# EAGLE board yuanlitu (EAGLE 9.6.2)
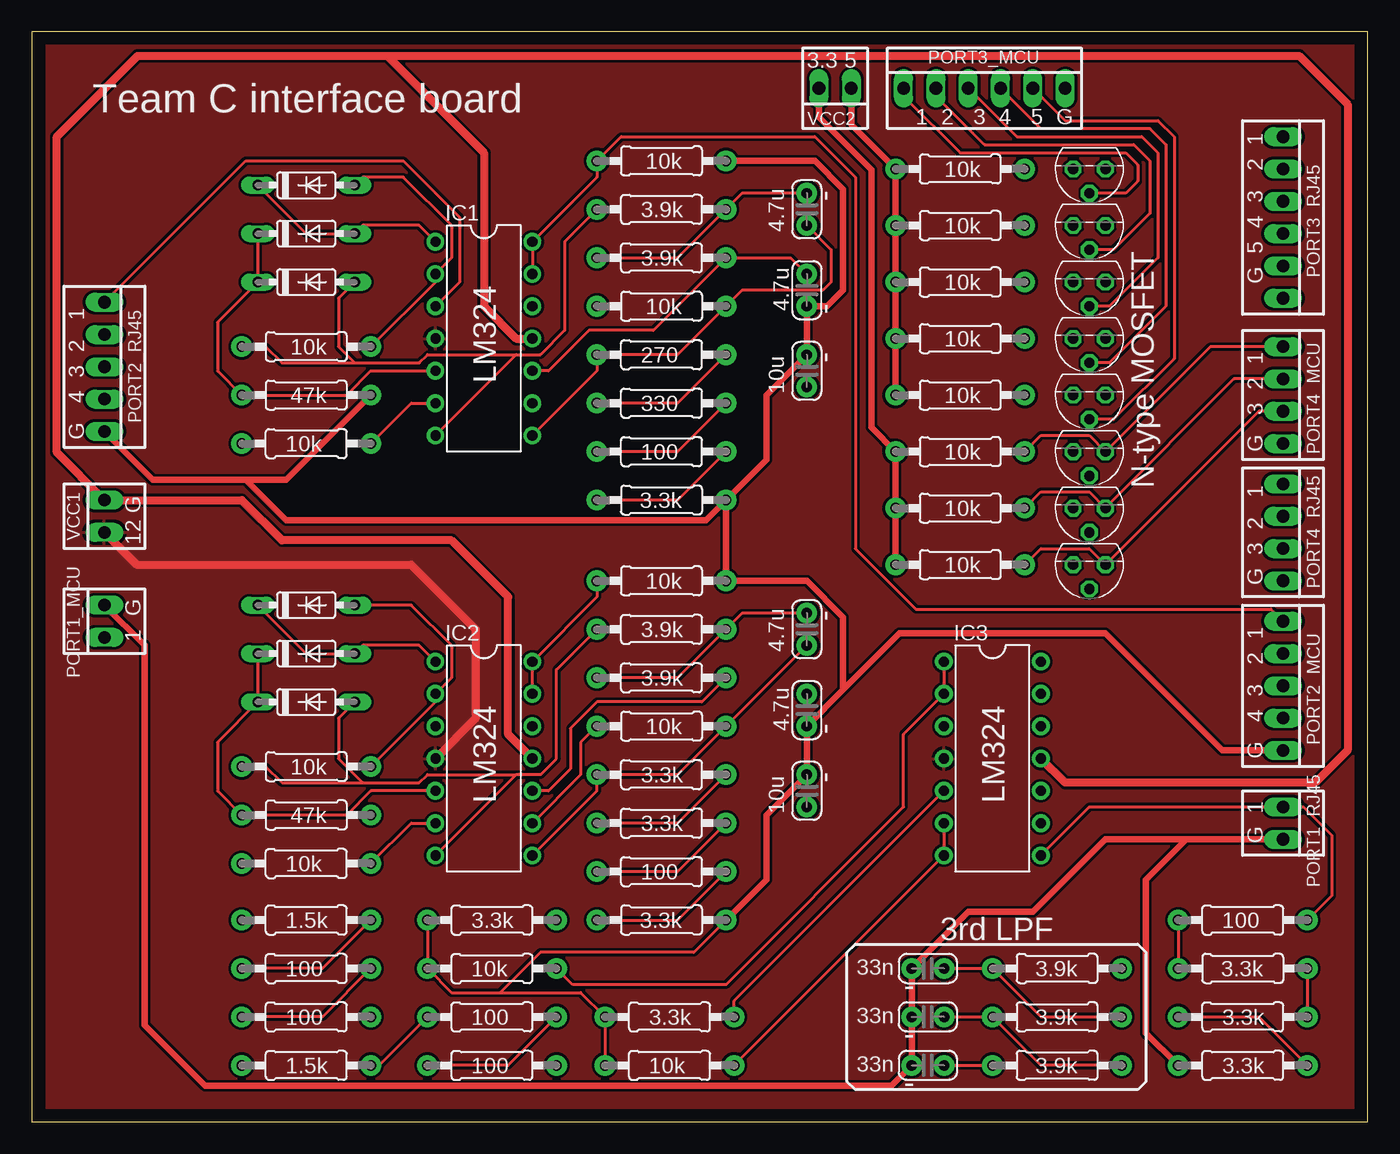
[diagram p0: board, top side]
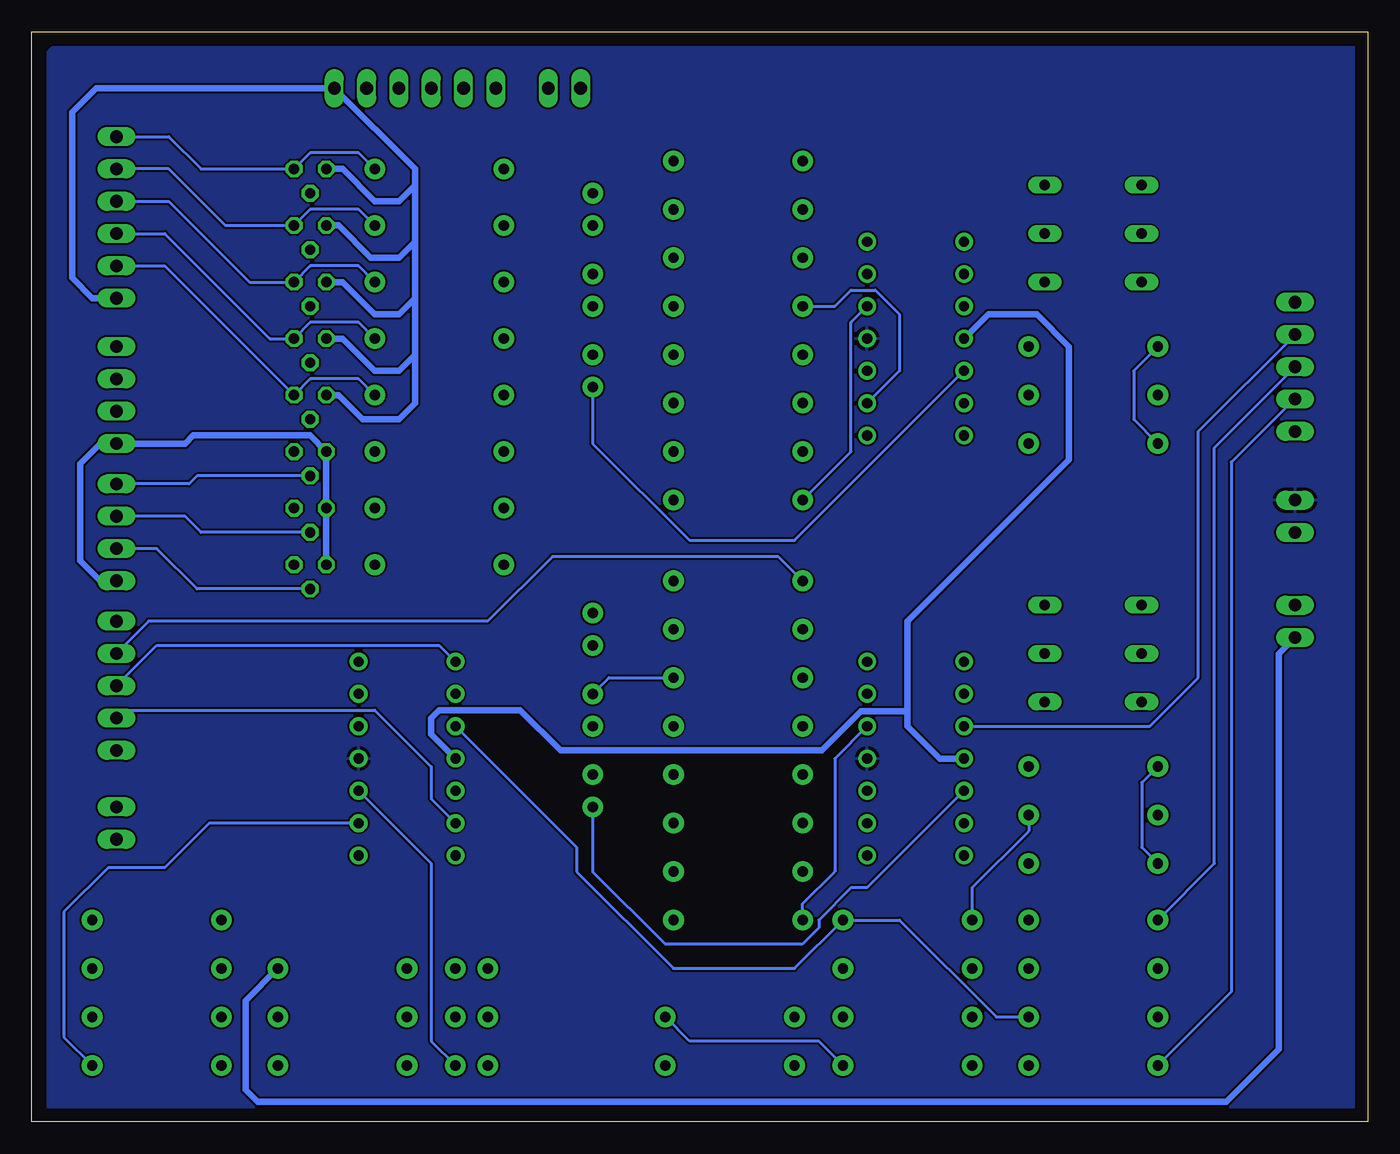
[diagram p1: board, bottom side, seen from below]

Size 105.08 x 85.72 mm. Coordinates in mm from the lower left corner, seen from the top.
Outline: 0,0 105.08,0 105.08,85.72 0,85.72 0,0
Copper layers (1*16): Top 0.035mm / dielectric 1.5mm / Bottom 0.035mm
Design rules "default *": minimum track width 6mil, minimum drill 0.35mm, track to track 6mil, track to pad 6mil, pad to pad 6mil, via to via 6mil, smd to smd 6mil, copper to edge 40mil, drill to drill 6mil, minimum pad ring 10mil, minimum via ring 8mil, stop-mask expansion 4mil, vias tented up to drill 0mil, thermal gap 10mil
Net classes: 0 default: clearance 0.205 mm; 1 Source: clearance 0.205 mm to class 0, clearance 0.205 mm

## Footprints (pad centres in the part's own frame; a part is rotated, then mirrored left to right if it is on the bottom)
C025-024X044 = drill 0.813 pad 1.626: 1 -1.27,0; 2 1.27,0
DO35-7 = drill 0.813 long: A 3.81,0; C -3.81,0
DIL14 = drill 0.8 pad 1.4: 1 -3.81,7.62; 2 -3.81,5.08; 3 -3.81,2.54; 4 -3.81,0; 5 -3.81,-2.54; 6 -3.81,-5.08; 7 -3.81,-7.62; 8 3.81,-7.62; 9 3.81,-5.08; 10 3.81,-2.54; 11 3.81,0; 12 3.81,2.54; 13 3.81,5.08; 14 3.81,7.62
22-23-2021 = drill 1 long: 1 -1.27,0; 2 1.27,0
22-23-2051 = drill 1 long: 1 -5.08,0; 2 -2.54,0; 3 0,0; 4 2.54,0; 5 5.08,0
22-23-2061 = drill 1 long: 1 -6.35,0; 2 -3.81,0; 3 -1.27,0; 4 1.27,0; 5 3.81,0; 6 6.35,0
22-23-2041 = drill 1 long: 1 -3.81,0; 2 -1.27,0; 3 1.27,0; 4 3.81,0
TO92 = drill 0.813 octagon: 1 1.27,0; 2 0,1.905; 3 -1.27,0
R = drill 0.813 pad 1.626: 1 -5.08,0; 2 5.08,0

## Placement (x,y rotation side)
C1  10u  [C025-024X044]  60.96,59.05 90 top
C2  4.7u  [C025-024X044]  60.96,71.75 90 top
C3  4.7u  [C025-024X044]  60.96,65.41 270 top
C4  10u  [C025-024X044]  60.96,26.04 90 top
C5  4.7u  [C025-024X044]  60.96,38.73 90 top
C6  4.7u  [C025-024X044]  60.96,32.38 270 top
C7  33n  [C025-024X044]  70.49,12.06 180 top
C8  33n  [C025-024X044]  70.49,8.26 180 top
C9  33n  [C025-024X044]  70.49,4.45 180 top
D1  1N4148DO35-7  [DO35-7]  21.59,73.66 0 top
D2  1N4148DO35-7  [DO35-7]  21.59,69.85 0 top
D3  1N4148DO35-7  [DO35-7]  21.59,66.04 0 top
D4  1N4148DO35-7  [DO35-7]  21.59,40.64 0 top
D5  1N4148DO35-7  [DO35-7]  21.59,36.83 0 top
D6  1N4148DO35-7  [DO35-7]  21.59,33.02 0 top
IC1  [DIL14]  35.56,61.59 0 top
IC2  [DIL14]  35.56,28.57 0 top
IC3  [DIL14]  75.56,28.57 0 top
PORT1_MCU  22-23-2021  [22-23-2021]  5.71,39.37 90 top
PORT1_RJ45  22-23-2021  [22-23-2021]  98.43,23.5 270 top
PORT2_MCU  22-23-2051  [22-23-2051]  98.43,34.29 270 top
PORT2_RJ45  22-23-2051  [22-23-2051]  5.71,59.37 270 top
PORT3_MCU  [22-23-2061]  74.93,81.28 0 top
PORT3_RJ45  [22-23-2061]  98.43,71.12 270 top
PORT4_MCU  22-23-2041  [22-23-2041]  98.43,57.15 270 top
PORT4_RJ45  22-23-2041  [22-23-2041]  98.43,46.35 270 top
Q1  BSS101  [TO92]  83.19,74.93 180 top
Q2  BSS101  [TO92]  83.19,70.48 180 top
Q3  BSS101  [TO92]  83.19,66.04 180 top
Q4  BSS101  [TO92]  83.19,61.59 180 top
Q5  BSS101  [TO92]  83.19,57.15 180 top
Q6  BSS101  [TO92]  83.19,52.7 180 top
Q7  BSS101  [TO92]  83.19,48.26 180 top
Q8  BSS101  [TO92]  83.19,43.81 180 top
R1  10k  [R]  21.59,60.96 180 top
R2  47k  [R]  21.59,57.15 180 top
R3  10k  [R]  21.59,53.34 0 top
R4  3.9k  [R]  49.53,71.75 0 top
R5  3.9k  [R]  49.53,67.94 0 top
R6  10k  [R]  49.53,64.14 180 top
R7  270  [R]  49.53,60.33 0 top
R8  3.3k  [R]  49.53,48.9 180 top
R9  10k  [R]  49.53,75.56 180 top
R10  330  [R]  49.53,56.52 0 top
R11  100  [R]  49.53,52.7 0 top
R12  10k  [R]  21.59,27.94 180 top
R13  47k  [R]  21.59,24.13 180 top
R14  10k  [R]  21.59,20.32 0 top
R15  3.9k  [R]  49.53,38.73 0 top
R16  3.9k  [R]  49.53,34.92 0 top
R17  10k  [R]  49.53,31.11 180 top
R18  3.3k  [R]  49.53,27.3 0 top
R19  3.3k  [R]  49.53,15.88 180 top
R20  10k  [R]  49.53,42.55 180 top
R21  3.3k  [R]  49.53,23.5 0 top
R22  100  [R]  49.53,19.68 0 top
R23  1.5k  [R]  21.59,15.88 0 top
R24  3.3k  [R]  36.2,15.88 0 top
R25  10k  [R]  36.2,12.06 0 top
R26  100  [R]  21.59,12.06 0 top
R27  100  [R]  21.59,8.26 0 top
R28  1.5k  [R]  21.59,4.45 0 top
R29  3.3k  [R]  50.16,8.26 0 top
R30  10k  [R]  50.16,4.45 0 top
R31  100  [R]  36.2,8.26 0 top
R32  100  [R]  36.2,4.45 0 top
R33  3.9k  [R]  80.65,12.06 180 top
R34  3.9k  [R]  80.65,8.26 180 top
R35  3.9k  [R]  80.65,4.45 180 top
R36  3.3k  [R]  95.25,4.45 0 top
R37  3.3k  [R]  95.25,8.26 0 top
R38  3.3k  [R]  95.25,12.06 180 top
R39  100  [R]  95.25,15.88 0 top
R40  10k  [R]  73.03,74.93 180 top
R41  10k  [R]  73.03,70.48 180 top
R42  10k  [R]  73.03,66.04 180 top
R43  10k  [R]  73.03,61.59 180 top
R44  10k  [R]  73.03,57.15 180 top
R45  10k  [R]  73.03,52.7 180 top
R46  10k  [R]  73.03,48.26 180 top
R47  10k  [R]  73.03,43.81 180 top
VCC1  22-23-2021  [22-23-2021]  5.71,47.62 90 top
VCC2  22-23-2021  [22-23-2021]  63.18,81.28 180 top

## Library data of the parts
C1-C9 = Passives; SUPPLIER: Onecall; TYPE: Capacitor
D1-D6 = diode
IC1-IC3 = Opamp
PORT1_MCU PORT1_RJ45 VCC1 VCC2 = con-molex; MF: MOLEX; MPN: 22-23-2021; OC_FARNELL: 1462926; OC_NEWARK: 25C3832
PORT2_MCU PORT2_RJ45 = con-molex; MF: MOLEX; MPN: 22-23-2051; OC_FARNELL: 1462952; OC_NEWARK: 38C9178
PORT3_MCU PORT3_RJ45 = con-molex; MF: MOLEX; MPN: 22-23-2061; OC_FARNELL: 1462922; OC_NEWARK: 27C1933
PORT4_MCU PORT4_RJ45 = con-molex; MF: MOLEX; MPN: 22-23-2041; OC_FARNELL: 1462920; OC_NEWARK: 38C0355
Q1-Q8 = transistor-fet
R1-R47 = Passives; SUPPLIER: Onecall; TYPE: Resistor

## Nets
1-1OUT: IC3.8 PORT1_RJ45.1 R39.2
1-2 [GND]: C7.2 C8.2 C9.2 PORT1_MCU.2 PORT1_RJ45.2 R36.1
2-1: IC1.3 PORT2_RJ45.1
2-1OUT: IC1.13 IC1.14 PORT2_MCU.1 R9.2
2-2: IC2.3 PORT2_RJ45.2
2-2OUT: IC2.13 IC2.14 PORT2_MCU.2 R20.2
2-3: PORT2_RJ45.3 R23.1
2-3OUT: IC3.1 IC3.2 PORT2_MCU.3 R25.2
2-4: PORT2_RJ45.4 R28.1
2-4OUT: IC3.6 IC3.7 PORT2_MCU.4 R30.2
2-5 [GND]: C1.2 C3.2 C4.2 C6.2 PORT2_MCU.5 PORT2_RJ45.5 R2.1 R8.1 R9.1 R13.1 R19.1 R20.1 R24.1 R25.1 R29.1 R30.1
N$1: C3.1 IC1.10 R5.2
N$2: IC1.12 R8.2 R11.2
N$3: D3.A IC1.7 R1.2 R3.1 R4.1
N$4: C1.1 D2.C D3.C IC1.5 R2.2
N$5: D1.C D2.A IC1.1
N$6: D1.A IC1.2 R1.1
N$7: C2.2 R4.2 R5.1
N$8: IC1.6 R3.2
N$9: R7.2 R10.1
N$10: C2.1 IC1.8 R6.1 R7.1
N$11: R10.2 R11.1
N$12: C4.1 D5.C D6.C IC2.5 R13.2
N$13: D4.C D5.A IC2.1
N$14: D4.A IC2.2 R12.1
N$15: IC2.6 R14.2
N$16: D6.A IC2.7 R12.2 R14.1 R15.1
N$17: C5.2 R15.2 R16.1
N$18: C5.1 IC2.8 R17.1 R18.1
N$19: C6.1 IC2.10 R16.2
N$20: IC2.12 R19.2 R22.2
N$21: R18.2 R21.1
N$22: R21.2 R22.1
N$23: R40.2 R41.2 R42.2 R43.2 R44.2 VCC2.1
N$24: IC3.3 R24.2 R27.2
N$25: R23.2 R26.1
N$26: R26.2 R27.1
N$27: IC3.5 R29.2 R32.2
N$28: R28.2 R31.1
N$29: R31.2 R32.1
N$30: C7.1 R33.2 R34.1
N$31: C8.1 R34.2 R35.1
N$32: C9.1 IC3.10 R35.2
N$33: R37.2 R38.1
N$34: R38.2 R39.1
N$36: PORT1_MCU.1 R33.1
N$37: IC1.9 R6.2
N$38: PORT3_RJ45.1 Q1.3 R40.1
N$39: PORT3_RJ45.2 Q2.3 R41.1
N$40: PORT3_RJ45.3 Q3.3 R42.1
N$41: PORT3_RJ45.4 Q4.3 R43.1
N$42: PORT3_RJ45.5 Q5.3 R44.1
N$43: PORT3_MCU.1 Q1.2
N$44: PORT3_MCU.2 Q2.2
N$45: PORT3_MCU.3 Q3.2
N$46: PORT3_MCU.4 Q4.2
N$47: PORT3_MCU.5 Q5.2
N$48: PORT3_MCU.6 PORT3_RJ45.6 Q1.1 Q2.1 Q3.1 Q4.1 Q5.1
N$49: PORT4_MCU.1 Q6.3 R45.1
N$50: PORT4_MCU.2 Q7.3 R46.1
N$51: PORT4_MCU.3 Q8.3 R47.1
N$52: PORT4_RJ45.1 Q6.2
N$53: PORT4_RJ45.2 Q7.2
N$54: PORT4_RJ45.3 Q8.2
N$55: PORT4_MCU.4 PORT4_RJ45.4 Q6.1 Q7.1 Q8.1
N$56: IC2.9 R17.2
N$57: R45.2 R46.2 R47.2 VCC2.2
N$58: IC3.9 R36.2 R37.1
V+ [Source]: IC1.4 IC2.4 IC3.4 VCC1.1
V- [GND]: IC1.11 IC2.11 IC3.11 VCC1.2

## Tracks (layer width: path | path; a pad name or v marks a point on that pad's centre or on a via)
1-1OUT
  Top 0.254: IC3.8 83.19,24.77 PORT1_RJ45.1 100.01,24.77 102.24,22.54 102.24,17.78 R39.2
1-2
  Top 0.508: PORT1_MCU.2 8.89,37.47 8.89,7.62 13.65,2.86 67.63,2.86 C9.2 C8.2 C7.2 73.66,16.51 78.74,16.51 84.46,22.23 90.81,22.23 | PORT1_RJ45.2 90.81,22.23 | 90.81,22.23 87.63,19.05 87.63,6.99 R36.1
2-1
  Top 0.254: PORT2_RJ45.1 16.83,75.56 29.21,75.56 33.66,71.12 33.66,66.04 IC1.3
2-1OUT
  Top 0.254: IC1.13 IC1.14 44.45,74.3 R9.2 46.35,77.47 61.59,77.47 64.77,74.3 64.77,45.09 69.53,40.32 97.47,40.32 PORT2_MCU.1
2-2
  Bottom 0.254: IC2.3 17.14,31.11 13.34,34.92 13.34,54.29 PORT2_RJ45.2
2-2OUT
  Top 0.254: R20.2 44.45,41.27 IC2.14 IC2.13
  Bottom 0.254: PORT2_MCU.2 95.88,39.37 69.22,39.37 64.13,44.45 46.35,44.45 R20.2
2-3
  Bottom 0.254: R23.1 12.07,20.32 12.07,53.02 PORT2_RJ45.3
2-3OUT
  Top 0.254: R25.2 42.55,10.79 54.61,10.79 68.58,24.77 68.58,30.48 IC3.2 IC3.1
  Bottom 0.254: IC3.1 73.03,37.47 95.25,37.47 PORT2_MCU.3
2-4
  Bottom 0.254: PORT2_RJ45.4 5.78,56.83 10.73,51.88 10.73,10.22 R28.1
2-4OUT
  Top 0.254: IC3.6 IC3.7 R30.2
  Bottom 0.254: PORT2_MCU.4 97.79,32.38 78.1,32.38 73.66,27.94 73.66,25.4 IC3.6
2-5
  Top 0.254: R24.1 R25.1 33.02,10.16 36.83,10.16 | R30.1 R29.1 43.18,10.16 36.83,10.16 | R19.1 52.07,13.34 40.01,13.34 36.83,10.16
  Top 0.508: 16.83,50.48 9.53,50.48 PORT2_RJ45.5 | 16.83,50.48 20,47.31 53.02,47.31 R8.1 | R8.1 57.79,52.07 57.79,57.15 C1.2 C3.2 62.55,64.14 63.82,65.41 63.82,73.34 61.59,75.56 R9.1 | R8.1 R20.1 60.96,42.55 63.82,39.69 63.82,33.97 | 63.82,33.97 C6.2 C4.2 57.79,24.13 57.79,19.05 R19.1 | PORT2_MCU.5 93.66,29.21 84.46,38.42 68.26,38.42 63.82,33.97 | R2.1 20,50.48 16.83,50.48
  Bottom 0.254: R13.1 26.67,22.86 31.12,18.41 R24.1
N$1
  Top 0.254: C3.1 59.69,67.94 R5.2 48.9,62.23 43.81,62.23 40.64,59.05 IC1.10
N$2
  Top 0.254: R11.2 50.8,48.9 R8.2
  Bottom 0.254: R8.2 40.64,52.7 40.64,62.87 IC1.12
N$3
  Top 0.254: IC1.7 38.1,60.33 | R4.1 41.91,69.22 41.91,62.23 40.01,60.33 38.1,60.33 | D3.A 24.13,64.77 24.13,60.96 25.4,59.69 | R1.2 18.41,60.96 19.69,59.69 25.4,59.69 | 25.4,59.69 30.48,59.69 31.12,60.33 38.1,60.33
  Bottom 0.254: R3.1 18.41,55.24 18.41,59.05 R1.2
N$4
  Top 0.254: D2.C D3.C 14.61,62.87 14.61,59.05 R2.2 24.77,57.15 26.67,59.05 IC1.5
  Bottom 0.254: IC1.5 45.09,45.72 53.34,45.72 60.96,53.34 C1.1
N$5
  Top 0.254: IC1.1 30.48,70.48 26.04,70.48 D2.A 21.59,69.85 D1.C
N$6
  Top 0.254: R1.1 31.75,66.04 IC1.2 33.02,67.94 33.02,70.48 29.21,74.3 26.04,74.3 D1.A
N$7
  Top 0.254: R5.1 50.8,67.94 R4.2 55.88,73.03 C2.2
N$8
  Top 0.254: R3.2 29.84,56.52 IC1.6
N$9
  Top 0.254: R7.2 50.8,56.52 R10.1
N$10
  Top 0.254: C2.1 62.87,68.58 62.87,66.04 62.23,65.41 55.88,65.41 R6.1 50.8,60.33 R7.1 44.45,59.05 IC1.8
N$11
  Top 0.254: R10.2 50.8,52.7 R11.1
N$12
  Top 0.254: D5.C D6.C 14.61,29.84 14.61,26.04 R13.2 24.77,24.13 26.67,26.04 IC2.5
  Bottom 0.254: C4.1 60.96,19.68 55.24,13.97 44.46,13.97 43.18,15.25 43.18,15.88 40.64,18.41 39.37,18.41 IC2.5
N$13
  Top 0.254: D4.C 21.59,36.83 D5.A 26.04,37.47 30.48,37.47 IC2.1
N$14
  Top 0.254: D4.A 29.84,40.64 33.02,37.47 33.02,34.92 IC2.2 31.75,33.02 R12.1
N$15
  Top 0.254: R14.2 29.84,23.5 IC2.6
N$16
  Top 0.254: R15.1 41.27,35.56 41.27,28.57 40.01,27.3 38.1,27.3 | IC2.7 38.1,27.3 | 26.04,26.67 24.13,28.57 24.13,31.75 D6.A | R12.2 18.41,27.94 19.69,26.67 26.04,26.67 | 38.1,27.3 31.12,27.3 30.48,26.67 26.04,26.67
  Bottom 0.254: R12.2 17.78,26.67 17.78,21.59 R14.1
N$17
  Top 0.254: R16.1 50.8,34.92 R15.2 55.88,40.01 C5.2
N$18
  Top 0.254: C5.1 R17.1 50.8,27.3 R18.1 44.45,26.04 IC2.8
N$19
  Top 0.254: R16.2 52.7,33.02 44.45,33.02 42.37,30.94 42.37,27.76 40.64,26.04 IC2.10
  Bottom 0.254: C6.1 59.69,34.92 R16.2
N$20
  Top 0.254: R22.2 50.8,15.88 R19.2
  Bottom 0.254: IC2.12 41.91,28.57 41.91,19.68 44.45,17.14 R19.2
N$21
  Top 0.254: R18.2 50.8,23.5 R21.1
N$22
  Top 0.254: R21.2 50.8,19.68 R22.1
N$23
  Top 0.508: VCC2.1 64.45,78.42 R40.2 R41.2 R42.2 R43.2 R44.2
N$24
  Bottom 0.254: IC3.3 62.23,21.59 62.23,19.68 54.61,12.06 45.09,12.06 R24.2 36.83,15.88 29.21,8.26 R27.2
N$25
  Top 0.254: R23.2 22.86,12.06 R26.1
N$26
  Top 0.254: R26.2 22.86,8.26 R27.1
N$27
  Top 0.254: R29.2 55.24,9.53 IC3.5
  Bottom 0.254: R32.2 43.18,6.35 53.34,6.35 R29.2
N$28
  Top 0.254: R31.1 27.3,4.45 R28.2
N$29
  Top 0.254: R31.2 37.47,4.45 R32.1
N$30
  Top 0.254: C7.1 R33.2 79.38,8.26 R34.1
N$31
  Top 0.254: C8.1 R34.2 79.38,4.45 R35.1
N$32
  Top 0.254: C9.1 R35.2
  Bottom 0.254: IC3.10 73.66,20.32 73.66,6.35 C9.1
N$33
  Top 0.254: R38.1 R37.2
N$34
  Top 0.254: R39.1 R38.2
N$36
  Bottom 0.508: PORT1_MCU.1 6.99,36.83 6.99,5.71 11.11,1.59 87.31,1.59 88.26,2.54 88.26,9.53 R33.1
N$37
  Bottom 0.254: R6.2 41.91,64.14 40.64,65.41 38.73,65.41 36.83,63.5 36.83,59.05 IC1.9
N$38
  Bottom 0.254: PORT3_RJ45.1 94.3,77.47 91.76,74.93 Q1.3 84.41,74.94 84.41,74.98 83.19,76.2 79.38,76.2 R40.1
N$39
  Bottom 0.254: PORT3_RJ45.2 94.3,74.93 89.85,70.48 Q2.3 83.19,71.75 79.38,71.75 R41.1
N$40
  Bottom 0.254: PORT3_RJ45.3 94.3,72.39 87.95,66.04 Q3.3 83.19,67.31 79.38,67.31 R42.1
N$41
  Bottom 0.254: PORT3_RJ45.4 94.62,69.85 86.36,61.59 Q4.3 83.19,62.87 79.38,62.87 R43.1
N$42
  Bottom 0.254: PORT3_RJ45.5 94.62,67.31 Q5.3 83.19,58.42 79.38,58.42 R44.1
N$43
  Top 0.254: PORT3_MCU.1 68.58,80.64 73.03,76.2 86.04,76.2 87,75.25 87,73.98 86.04,73.03 Q1.2
N$44
  Top 0.254: PORT3_MCU.2 71.12,80.64 74.93,76.83 86.68,76.83 87.95,75.56 87.95,71.44 85.09,68.58 Q2.2
N$45
  Top 0.254: PORT3_MCU.3 77.47,77.47 87.31,77.47 88.58,76.2 88.58,67.94 84.77,64.14 Q3.2
N$46
  Top 0.254: PORT3_MCU.4 79.38,78.11 87.95,78.11 89.22,76.83 89.22,64.14 84.77,59.69 Q4.2
N$47
  Top 0.254: PORT3_MCU.5 81.28,78.74 88.58,78.74 89.85,77.47 89.85,60.01 85.09,55.24 Q5.2
N$48
  Bottom 0.508: 74.93,73.66 74.93,74.93 PORT3_MCU.6 100.01,81.28 101.92,79.38 101.92,66.36 100.33,64.77 PORT3_RJ45.6 | 74.93,73.66 76.2,72.39 78.1,72.39 80.65,74.93 Q1.1 | 74.93,73.66 74.93,69.22 | 74.93,69.22 74.93,64.77 | 74.93,64.77 74.93,60.33 | 74.93,64.77 76.2,63.5 78.1,63.5 80.65,66.04 Q3.1 | 74.93,69.22 76.2,67.94 78.42,67.94 80.96,70.48 Q2.1 | Q5.1 80.96,57.15 79.06,55.24 76.2,55.24 74.93,56.52 74.93,60.33 | 74.93,60.33 76.2,59.05 78.1,59.05 80.64,61.59 Q4.1
N$49
  Top 0.254: PORT4_MCU.1 92.71,60.96 Q6.3 83.19,53.98 79.38,53.98 R45.1
N$50
  Top 0.254: PORT4_MCU.2 94.56,58.42 84.41,48.27 | 84.41,48.27 Q7.3 | R46.1 79.38,49.53 83.19,49.53 84.41,48.31 84.41,48.27
N$51
  Top 0.254: PORT4_MCU.3 96.52,55.88 Q8.3 83.19,45.09 79.38,45.09 R47.1
N$52
  Bottom 0.254: Q6.2 92.07,50.8 92.71,50.16 PORT4_RJ45.1
N$53
  Bottom 0.254: Q7.2 91.76,46.35 93.03,47.62 PORT4_RJ45.2
N$54
  Bottom 0.254: Q8.2 92.07,41.91 95.25,45.09 PORT4_RJ45.3
N$55
  Bottom 0.508: PORT4_RJ45.4 99.69,42.55 101.28,44.13 101.28,51.75 99.69,53.34 PORT4_MCU.4 93.03,53.34 92.39,53.98 83.19,53.98 Q6.1 Q7.1 Q8.1
N$56
  Top 0.254: R17.2 43.18,29.84 43.18,27.3 IC2.9
N$57
  Top 0.508: VCC2.2 61.91,78.98 66.04,74.85 66.04,59.16 66.04,54.61 R45.2 R46.2 R47.2
N$58
  Top 0.254: R37.1 96.52,8.26 R36.2
  Bottom 0.254: IC3.9 91.12,23.5 94.62,20 99.06,20 102.55,16.51 102.55,6.67 R36.2
V+
  Top 0.635: VCC1.1 8.26,43.81 29.84,43.81 34.92,38.73 34.92,31.75 IC2.4
  Bottom 0.508: IC2.4 33.66,28.57 36.2,31.11 36.2,32.38 | 36.2,32.38 36.2,39.37 23.5,52.07 23.5,60.96 26.04,63.5 29.84,63.5 IC1.4 | IC3.4 73.66,30.48 73.66,31.75 73.03,32.38 66.67,32.38 63.5,29.21 42.91,29.21 39.85,32.27 36.31,32.27 36.2,32.38
  pour Top: 0.64,84.77 104.46,84.77 105.41,85.72 105.41,0.32 105.09,0 0.95,0 0.64,0.32
V-
  Top 0.635: 27.94,83.82 8.32,83.82 1.97,77.47 1.97,52.64 VCC1.2 16.51,48.9 19.69,45.72 33.02,45.72 37.47,41.27 37.47,30.48 IC2.11 | 27.94,83.82 35.56,76.2 35.56,64.14 38.1,61.59 IC1.11 | 27.94,83.82 99.69,83.82 103.5,80.01 103.5,29.21 100.97,26.67 81.28,26.67 IC3.11
  pour Bottom: 0.95,84.45 103.5,84.45 103.82,84.14 103.82,0.32 0.95,0.32

## Text on the board
tNames: 3.3 5 | 1 2 3 4 5 G | Team C interface board | G 5 4 3 2 1 | - | - | - | LM324 | G 4 3 2 1 | G 3 2 1 | N-type MOSFET | 12 G | G 3 2 1 | - | 1 G | - | G 4 3 2 1 | - | LM324 | LM324 | G 1 | 3rd LPF | - | - | -